# Altium PCB PCBNode.PcbDoc
Units mil, origin at the board's own origin, x right, y up, seen from the top; angles counter-clockwise.
Board outline 2560 x 2010 mil, 2 copper layers (Top Layer, Bottom Layer); 26 components, 23 nets, 106 pads, 15 vias.
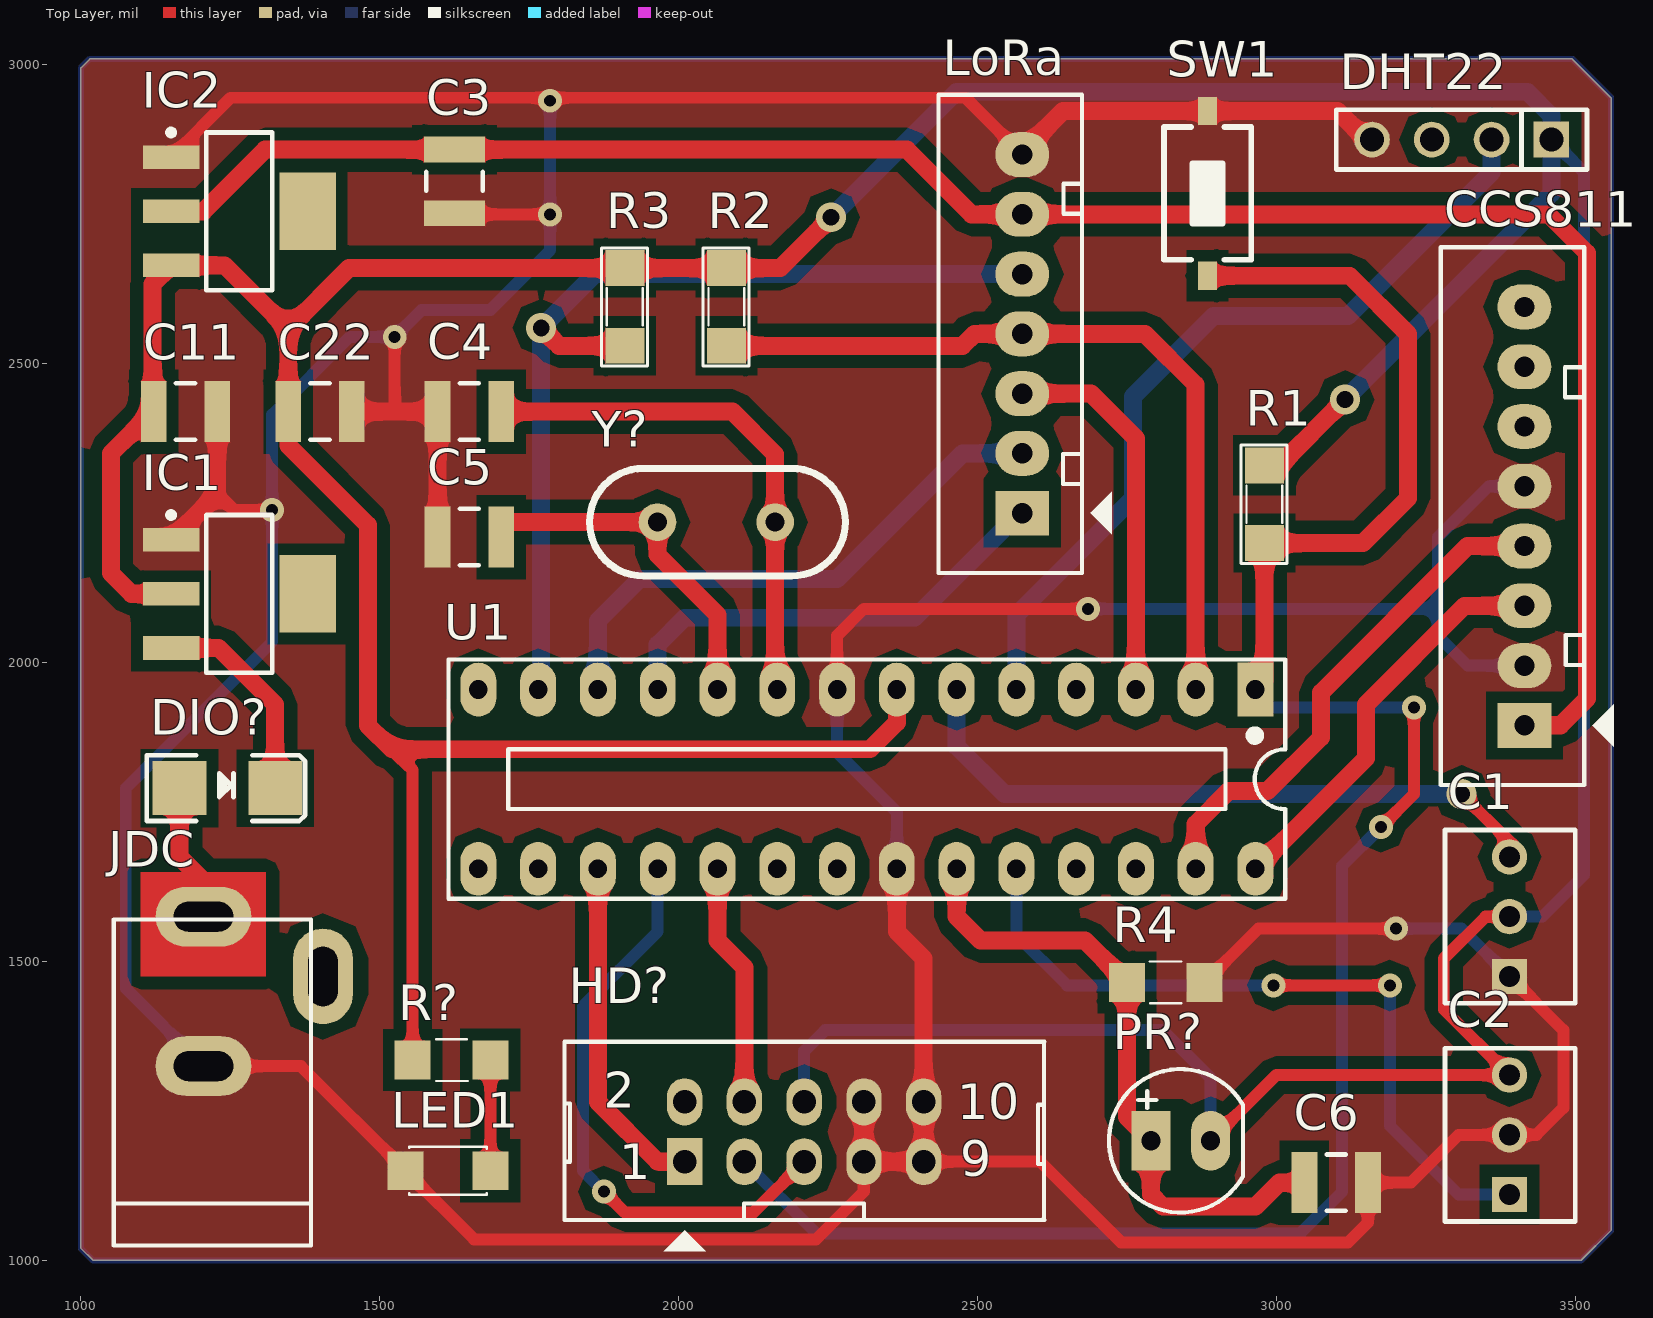
[diagram p0: Top Layer view]
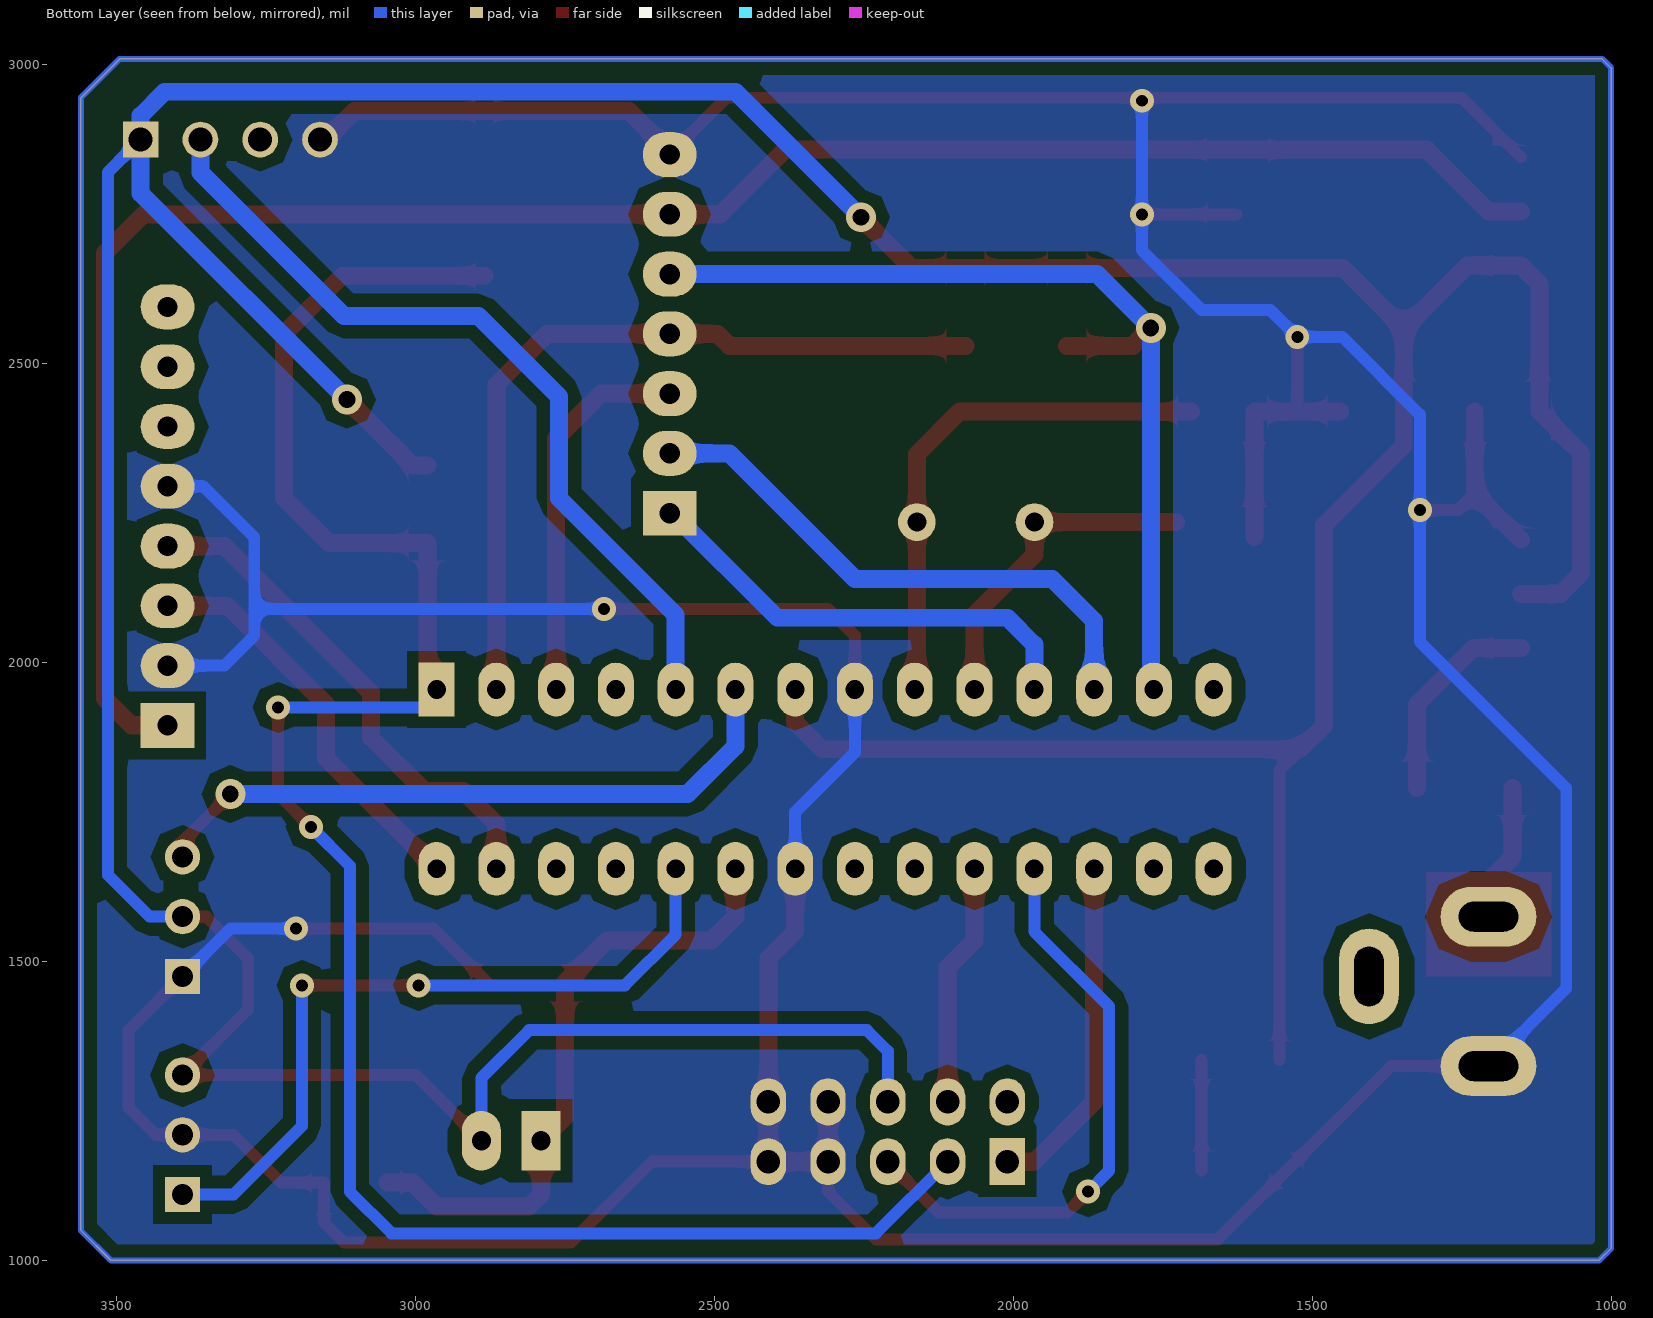
[diagram p1: Bottom Layer view, seen from below]
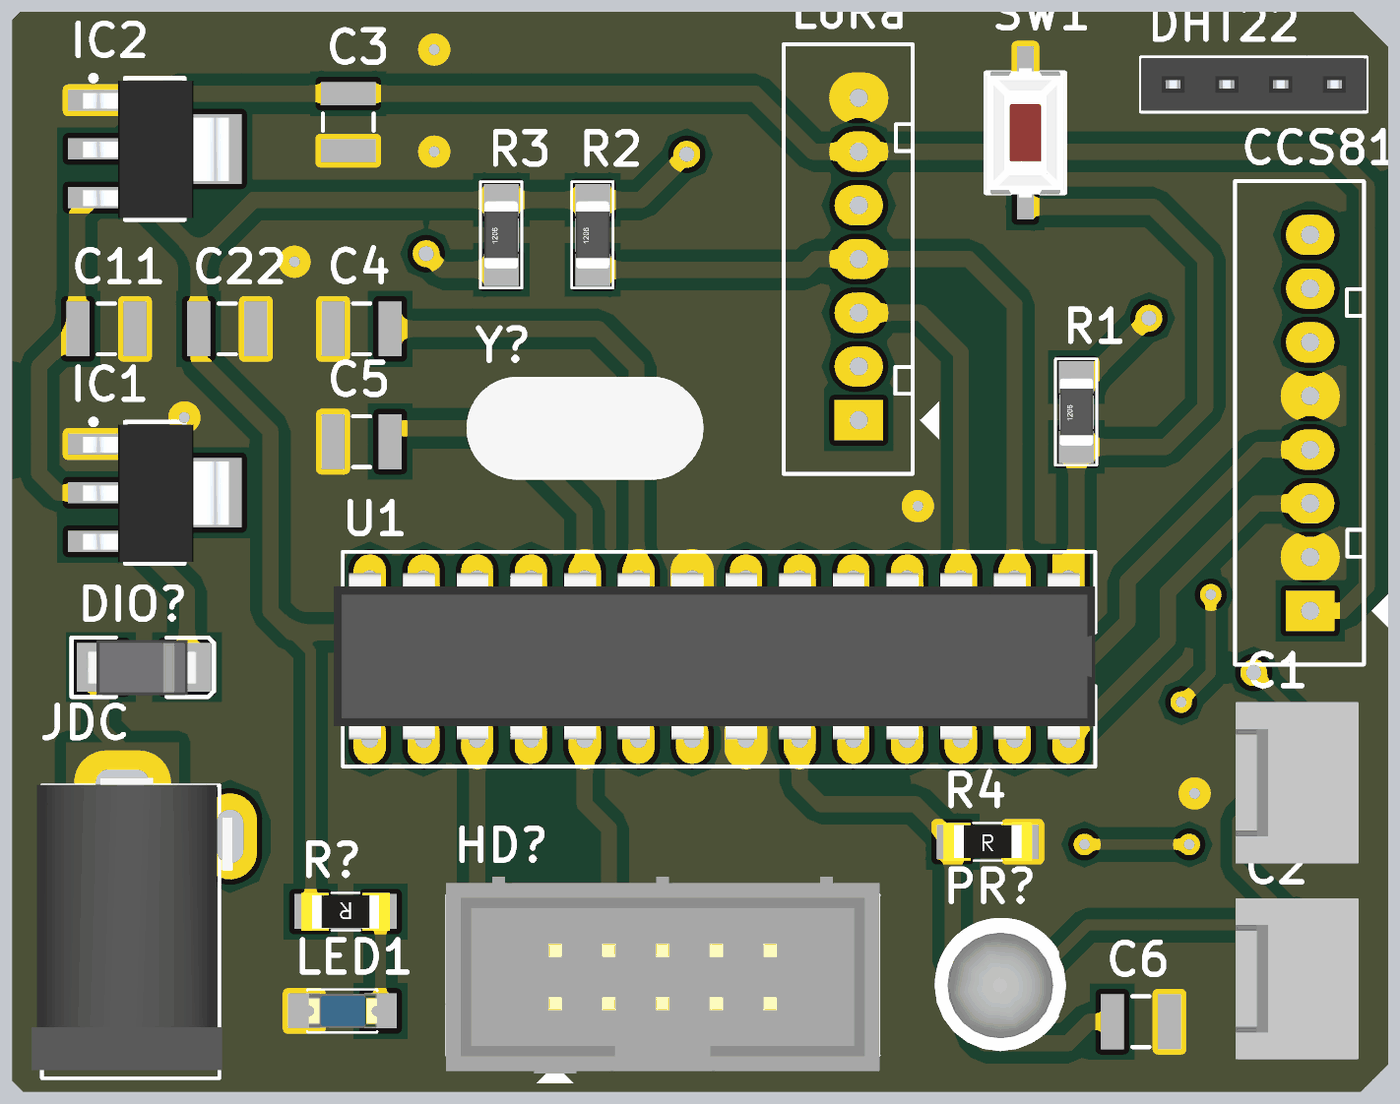
[diagram p2: 3D render of the assembled board from above, using the file's embedded part models]

## Layer stack, top to bottom
Top Solder: solder mask 0.4, Solder Resist, Dk 3.5
Top Layer: signal copper 1.4
Dielectric 1: dielectric 12.6, FR-4, Dk 4.8
Bottom Layer: signal copper 1.4
Bottom Solder: solder mask 0.4, Solder Resist, Dk 3.5

## Board outline
1020,1000 1000,1020 1000,2995 1015,3010 3495,3010 3560,2945 3560,1050 3510,1000

## Design rules (kind name [scope] priority, off if disabled: settings)
Clearance [All] p1: gap=20
PlaneClearance [All] p1: clearance=30
PlaneConnect [All] p1: planeconnectstyle=Relief reliefexpansion=20 reliefentries=4 reliefconductorwidth=15 reliefairgap=15
PolygonConnect [All] p1: connectstyle=Direct reliefconductorwidth=10 reliefentries=4 polygonreliefangle="90 Angle" airgapwidth=10
RoutingVias [All] p1: holewidth=20 width=40 viastyle="Through Hole" minholewidth=20 minwidth=40 maxholewidth=20 maxwidth=40
SolderMaskExpansion [All] p1: expansion=10
Width [All] p1: maxlimit=40 minlimit=10 preferedwidth=20 minimp=50.000000 maximp=50.000000 favimp=50.000000
28 further rules are at their usual default settings.

## Components (designator, comment, footprint, x,y, rotation, side; value= is the part's Value field where it differs from the comment)
C1 "ChatLong" HDR3 3390,1475 r90 top
C2 "ZMCT350B" HDR3 3390,1110 r90 top
C3 "Cap Semi" C1210 1625,2805 r90 top
C4 "Cap" C1210 1650,2420 r0 top
C5 "Cap" C1210 1650,2210 r0 top
C6 "Cap Semi" C1210 3100,1130 r0 top
C11 "Cap Semi" C1210 1175,2420 r180 top
C22 "Cap Semi" C1210 1400,2420 r180 top
CCS811 "JP8" Header8 3415,1895 r90 top
DHT22 "DHT22" JP4-C1T 3460,2875 r180 top
DIO? "Diode SMD" DIO-SMD-106 1245,1790 r180 top
HD? "ISP" Hed2X5 2010,1165 r0 top
IC1 "LM1117-5V" SOT223-4N 1265,2115 r0 top
IC2 "LM1117-3.3V" SOT223-4N 1265,2755 r0 top
JDC "Jac DC" DC0 1305,1450 r90 top
LED1 "LED SMD" SM-LED-1206-Blue 1685,1150 r180 top
LoRa "JP7" Header7 2575,2250 r90 top
PR? "CDS1" LED-5-WHITE 2840,1200 r0 top
R1 "1k" SM-RES-1206 2980,2200 r90 top
R2 "10k" SM-RES-1206 2080,2530 r90 top
R3 "10k" SM-RES-1206 1910,2530 r90 top
R4 "1K" RM-1206 2815,1465 r0 top
R? "1k" RM-1206 1620,1335 r180 top
SW1 "SW" SW1-SMD 2885,2785 r270 top
U1 "ATmega328-PU" DIP28 2965,1955 r180 top
Y? "16MHz" XTAL 2065,2235 r0 top

## Footprints (in the part's own frame and the unit in brackets; to place one, negate y for a bottom-side part, rotate by r counter-clockwise, add the part's x,y. Pads: shape width x height; smd on the part's side, far side on the other; paste and mask are expansions set on the pad)
C1210 [mm] "Chip Capacitor, Body 3.2x2.5mm, IPC High Density"
  rect 1.1x2.6 smd: 1(-1.35,0) 2(1.35,0)
  silkscreen extent -0.4,-1.2 0.4,1.2, body extent -1.7,-1.35 1.7,1.35, height 1.3
DC0 [mil] "Jac DC input"
  oval 100x160 hole 50 slot 100 at 90 deg: 1(125,100) 2(-125,100)
  oval 160x100 hole 50 slot 100 at 0 deg: 3(25,-100)
  silkscreen extent -425,-80 120,250, body extent -410,-105 134,269, height 434
DIO-SMD-106 [mil]
  rect 90x90.55 smd: 1(80,0) 2(-80,0)
  silkscreen extent -130,-55 135,55, body extent -99,-50 106,52, height 95
DIP28 [mil] "DIP, 18-Leads, Row Spacing 7.62mm, Pitch 2.54mm, Body 22.8x7.3mm, Window"
  rect 60x90 hole 31: 1(0,0)
  oval 60x90 hole 31: 2(100,0) 3(200,0) 4(300,0) 5(400,0) 6(500,0) 7(600,0) 8(700,0) 9(800,0) 10(900,0) 11(1000,0) 12(1100,0) 13(1200,0) 14(1300,0) 15(1300,300) 16(1200,300) 17(1100,300) 18(1000,300) 19(900,300) 20(800,300) 21(700,300) 22(600,300) 23(500,300) 24(400,300) 25(300,300) 26(200,300) 27(100,300) 28(0,300)
  silkscreen extent -50,-50 1350,350, body extent -50,-10 1367,300, height 200
HDR3 [mm] "Connector; Header; 3 Position"
  rect 1.5x1.5 hole 0.9: 1(0,0)
  round 1.5 hole 0.9: 2(2.54,0) 3(5.08,0)
  silkscreen extent -1.14,-2.79 6.22,2.74, body extent -1.27,-2.92 6.35,2.88, height 11.72
Header7 [mil] "CON7"
  rect 75x90 hole 34: 1(0,0)
  oval 75x90 hole 34: 2(100,0) 3(200,0) 4(300,0) 5(400,0) 6(500,0) 7(600,0)
  silkscreen extent -100,-150 700,140
Header8 [mil] "CON8"
  rect 75x90 hole 34: 1(0,0)
  oval 75x90 hole 34: 2(100,0) 3(200,0) 4(300,0) 5(400,0) 6(500,0) 7(600,0) 8(700,0)
  silkscreen extent -100,-150 800,140
Hed2X5 [mm] "Header 10x2,20 pin, connecter"
  rect 1.5x2 hole 1: 1(0,0)
  oval 1.5x2 hole 1: 2(0,2.54) 3(2.54,0) 4(2.54,2.54) 5(5.08,0) 6(5.08,2.54) 7(7.62,0) 8(7.62,2.54) 9(10.16,0) 10(10.16,2.54)
  silkscreen extent -5.1,-3.81 15.29,5.11, body extent -5.17,-3.33 15.33,5.97, height 8.82
JP4-C1T [mm] "4 row, straight, gold plating"
  rect 1.52x1.52 hole 1.02: 1(0,0)
  round 1.52 hole 1.02: 2(2.54,0) 3(5.08,0) 4(7.62,0)
  silkscreen extent -1.52,-1.27 9.14,1.27, body extent -1.52,-1.25 9.14,1.25, height 8.51
LED-5-WHITE [mil] "LED 2 PIN, 5 ly , Only colour, pin to pin 110mil"
  rect 65x100 hole 32: 1(-50,0)
  oval 65x100 hole 32: 2(50,0)
  silkscreen extent -120,-120 104,120, body extent -124,-125 121,120, height 340
RM-1206 [mil] "Resistor SMD 120x60mil"
  rect 60x65 smd: 1(-65,0) 2(65,0)
  silkscreen extent -27,-35 26,35, body extent -83,-35 83,36, height 25
SM-LED-1206-Blue [mil] "Compoment SMD 120x60mil"
  rect 60x65 smd: 1(0,0) 2(142,0)
  silkscreen extent 6,-40 136,40, body extent 7,-31 133,32, height 43
SM-RES-1206 [mil]
  rect 60x65 smd: 1(0,0) 2(130,0)
  silkscreen extent -34,-38 164,39, body extent 2,-31 128,32, height 40
SOT223-4N [mm] "SOT223, 4-Leads, Body 6.5x3.5mm, Pitch 2.3mm, Lead Span 7mm, IPC Medium Density"
  rect 2.4x1 smd: 1(-2.9,2.3) 2(-2.9,0) 3(-2.9,-2.3)
  rect 2.4x3.3 smd: 4(2.9,0)
  silkscreen extent -3.02,-3.35 1.4,3.47, body extent -3.39,-3.27 3.5,3.23, height 1.72
SW1-SMD [mm]
  rect 1.2x0.8 smd: 1(-3.5,0) 2(3.5,0)
  silkscreen extent -2.82,-1.85 2.82,1.85, body extent -3.05,-1.85 3.05,1.85, height 2.5
XTAL [mm]
  round 1.6 hole 0.8: 1(-2.552,0.001) 2(2.448,0.001)
  silkscreen extent -5.44,-2.29 5.44,2.29, body extent -5.55,-2.32 5.62,2.35, height 3.63

## Part data
C1 C2: library part Header3, "Header IDC, 3 x 1 Pin Vertical 2.54mm Pitch (Non-Boxed, Male)"
C3 C6 C11 C22: "Capacitor (Semiconductor SIM Model)"
C4 C5: library part "Cap Semi", "Capacitor (Semiconductor SIM Model)"
CCS811: library part Header8, "Connector 8"
DIO?: "Default Diode"
HD?: library part HED5x2, "Header 5x2"
IC1 IC2: library part LM1117, "Available in 1.8V, 2.5V, 2.85V, 3.3V, 5V, and  Adjustable Versions"
JDC: library part DCIN, "Jac DC input"
LED1: library part LED-SMD-1206
LoRa: library part Header7, "Connector 7"
PR?: "Photoresistor"
R1 R2 R3 R?: library part R, "Resistor 1/4W"
R4: library part RM, "Resistor SMD"
SW1: library part SW2, "Switch button 2 pin"
U1: "8-bit AVR Microcontroller, 32KB Flash, 1KB EEPROM, 2KB SRAM, 28-pin PDIP, Industrial Grade (-40°C to 85°C)"
Y?: library part XTAL, "Crystal Oscillator"

## Via types
v1: diameter 40, hole 20, Top Layer to Bottom Layer, 11 vias
v2: diameter 50, hole 28, Top Layer to Bottom Layer, 4 vias

## Nets (pads, with @x,y where several pads share a name; then routed paths per layer and width w, separated by ;. In a path a pad name is that pad's centre, name@x,y a point inside that pad or via, vN(x,y) a via of type N, cw(c..) or ccw(c..) an arc to the next point about the centre after c; other vN are vias at no path point)
3.3V: C3.2 CCS811.1 IC2.2 LoRa.6 | length 3352.3
  Top Layer w30: IC2.2 1205,2755 1308.15,2858.15 C3.2 2381.85,2858.15 2490,2750 LoRa.6 3455,2750 3520,2685 3520,1940 3475,1895 CCS811.1
9V-12V: DIO?.2 IC1.3 | length 353.3
  Top Layer w30: IC1.3 1230.55,2024.45 1325,1930 DIO?.2
ADC: C6.1 PR?.1 R4.1 U1.23 | length 1063.8
  Top Layer w30: U1.23 2465,1575 2505,1535 2680,1535 R4.1 2750,1240 PR?.1 2790,1110 2810,1090 2965,1090 3005,1130 C6.1
ADC1: C2.1 U1.24 | length 1252.8
  Top Layer w20: v1(2995,1460) v1(3190,1460)
  Bottom Layer w20: U1.24 2565,1545 2650,1460 v1(2995,1460) ; v1(3190,1460) 3190,1225 3305,1110 C2.1
AUX: LoRa.5 R3.1 U1.13 | length 1601.8
  Top Layer w30: v2(1770,2560) 1800,2530 R3.1
  Bottom Layer w30: U1.13 1770,1960 v2(1770,2560) 1860,2650 LoRa.5
DATA: DHT22.2 U1.5 | length 1381.1
  Bottom Layer w30: U1.5 2565,2080 2760,2275 2760,2445 2895,2580 3120,2580 3360,2820 DHT22.2
DATA1: C1.3 U1.6 | length 1111.3
  Top Layer w20: v2(3310,1780) 3390,1700 C1.3
  Bottom Layer w30: U1.6 2465,1860 2545,1780 v2(3310,1780)
GND: C1.1 C2.2 C3.1 C4.1 C5.1 C6.2 C11.1 C22.1 CCS811.2 CCS811.5 DHT22.4 HD?.7 HD?.8 HD?.9 HD?.10 IC1.1 IC2.1 JDC.2 LED1.2 LoRa.7 R4.2 SW1.1 U1.8 U1.22 | length 11282.4
  Top Layer w20: IC2.1 1250.27,2945 2480,2945 LoRa.7 ; JDC.2 1368,1325 LED1.2 1658,1035 2230,1035 2310,1115 HD?.7 ; 1228.15,2282.88 1256.03,2255 v1(1320,2255) ; 1525,2420 v1(1525,2545) ; C3.1@1626.85,2750 v1(1785,2750) ; U1.8 2265,2045 2310,2090 v1(2685,2090) ; HD?.9 2605,1165 2740,1030 3120,1030 3153.15,1063.15 C6.2 3225,1130 3305,1210 C2.2 3435,1210 3480,1255 3480,1385 C1.1 ; R4.2 2970,1555 v1(3200,1555)
  Top Layer w30: IC1.1 1228.15,2282.88 C11.1 ; C22.1 1525,2420 C4.1 C5.1 ; HD?.8 HD?.7 HD?.9 HD?.10 2410,1505 2365,1550 U1.22 ; LoRa.7 2575,2855 2642.8,2922.8 SW1.1 3102.2,2922.8 3150,2875 DHT22.4
  Bottom Layer w20: JDC.2 1075,1455 1075,1790 1320,2035 v1(1320,2255) 1320,2415 1450,2545 v1(1525,2545) 1570,2590 1685,2590 1785,2690 v1(1785,2750) v1(1785,2940) ; U1.8 2265,1850 2365,1750 U1.22 ; v1(2685,2090) 3270,2090 ; v1(3200,1555) 3310,1555 C1.1 ; CCS811.2 3320,1995 3270,2045 3270,2090 ; CCS811.5 3355,2295 3270,2210 3270,2090
M0: LoRa.1 U1.11 | length 776.1
  Bottom Layer w30: U1.11 1965,2030 2010,2075 2395,2075 2570,2250 LoRa.1
M1: LoRa.2 U1.12 | length 941
  Bottom Layer w30: U1.12 1865,2070 1935,2140 2265,2140 2475,2350 LoRa.2
MISO: HD?.5 U1.18 | length 991
  Top Layer w20: v1(1875,1115) 1910,1080 2125,1080 HD?.5
  Bottom Layer w20: v1(1875,1115) 1840,1150 1840,1425 1965,1550 U1.18
MOSI: HD?.1 U1.17 | length 576.4
  Top Layer w30: U1.17 1865,1265 1965,1165 HD?.1
NetDIO?_1: DIO?.1 JDC.1 | length 231.6
  Top Layer w30: DIO?.1 1165,1675 1205,1635 JDC.1
NetLED1_1: LED1.1 R?.1 | length 185
  Top Layer w20: LED1.1 R?.1
RESET: HD?.3 R1.1 SW1.2 U1.1 | length 3372.2
  Top Layer w20: v1(3175,1725) 3230,1780 v1@3230,1920
  Top Layer w30: SW1.2 3122.8,2647.2 3220,2550 3220,2275 3145,2200 R1.1 U1.1@2980,1970
  Bottom Layer w20: HD?.3 2230,1045 3040,1045 3110,1115 3110,1660 v1(3175,1725) ; U1.1 2980,1940 2975,1935 2985,1925 v1(3230,1925)
RXD: LoRa.4 R2.1 U1.2 | length 1338.5
  Top Layer w30: R2.1 2475,2530 2495,2550 LoRa.4 2780,2550 2865,2465 U1.2
SCK: HD?.4 U1.19 | length 408.6
  Top Layer w30: U1.19 2065,1535 2110,1490 HD?.4
SCL: CCS811.3 U1.28 | length 685
  Top Layer w30: U1.28 3150,1840 3150,1930 3315,2095 CCS811.3
SDA: CCS811.4 U1.27 | length 861.5
  Top Layer w30: U1.27 2865,1730 2920,1785 2985,1785 3075,1875 3075,1950 3320,2195 CCS811.4
TXD: LoRa.3 U1.3 | length 641.1
  Top Layer w30: LoRa.3 2690,2450 2765,2375 U1.3
VCC: C1.2 C2.3 C11.2 C22.2 DHT22.1 HD?.6 IC1.2 IC2.3 PR?.2 R1.2 R2.2 R3.2 R?.2 U1.7 | length 9481.7
  Top Layer w20: 1520,1855 1555,1820 R?.2 ; PR?.2 3000,1310 C2.3 3280,1420 3280,1505 3350,1575 C1.2
  Top Layer w30: IC1.2 1085,2115 1050,2150 1050,2350 1120,2420 1120,2633.62 IC2.3 1240.55,2664.45 1346.85,2558.15 ; v2(2255,2745) 2170,2660 R2.2 R3.2 1448.7,2660 1346.85,2558.15 ; U1.7 2365,1900 2320,1855 1520,1855 1480,1895 1480,2230 1346.85,2363.15 C22.2 1346.85,2558.15 ; R1.2 3005,2330 v2(3115,2440)
  Bottom Layer w20: HD?.6 2210,1350 2245,1385 2810,1385 2890,1305 PR?.2 ; C1.2 3445,1575 3515,1645 3515,2820 DHT22.1
  Bottom Layer w30: v2(2255,2745) 2465,2955 3420,2955 3460,2915 DHT22.1 3460,2785 v2(3115,2440)
XTAL1: C4.2 U1.9 Y?.2 | length 877.8
  Top Layer w30: C4.2 2090,2420 2161.39,2348.61 Y?.2 U1.9@2161.39,1958.61
XTAL2: C5.2 U1.10 Y?.1 | length 558
  Top Layer w30: 1728.18,2235.03 Y?.1 1964.54,2180.46 2065,2080 U1.10
pads on no net: CCS811.6 CCS811.7 CCS811.8 DHT22.3 HD?.2 IC1.4 IC2.4 JDC.3 U1.4 U1.14 U1.15 U1.16 U1.20 U1.21 U1.25 U1.26
copper on no net: | length 9052.1
  Bottom Layer w10: 1000,1020 1020,1000 3510,1000 3560,1050 3560,2945 3495,3010 1015,3010 1000,2995 1000,1020

## Polygon pours and split planes (outlines as drawn)
GND on Bottom Layer "bottom" (solid, remove dead copper, pour order 0): 1015,3010 3495,3010 3560,2945 3560,1050 3510,1000 1020,1000 1000,1020 1000,2995 1015,3010
GND on Top Layer "top" (solid, remove dead copper, pour order 2): 1015,3010 3495,3010 3560,2945 3560,1050 3510,1000 1020,1000 1000,1020 1000,2995 1015,3010

## Other copper
Top Layer:
  rectangle net NetDIO?_1: 1100,1475 1310,1650

## Text inside footprints (layer, text, board x,y; h text height)
HD?: Top Overlay "1" at 1900.75,1135.47 h60; Top Overlay "2" at 1875,1255 h60; Top Overlay "9" at 2471,1141 h60; Top Overlay "10" at 2466,1236 h60